# Altium PCB FEV-60_Motor_Driver.PcbDoc (part 2 of 2)
Units mil, origin at the board's own origin, x right, y up, seen from the top; angles counter-clockwise.
Board outline 4025 x 5275 mil, 2 copper layers (Top Layer, Bottom Layer); 167 components, 100 nets, 583 pads, 163 vias.
Unrouted connection lines stored in the file: 1.
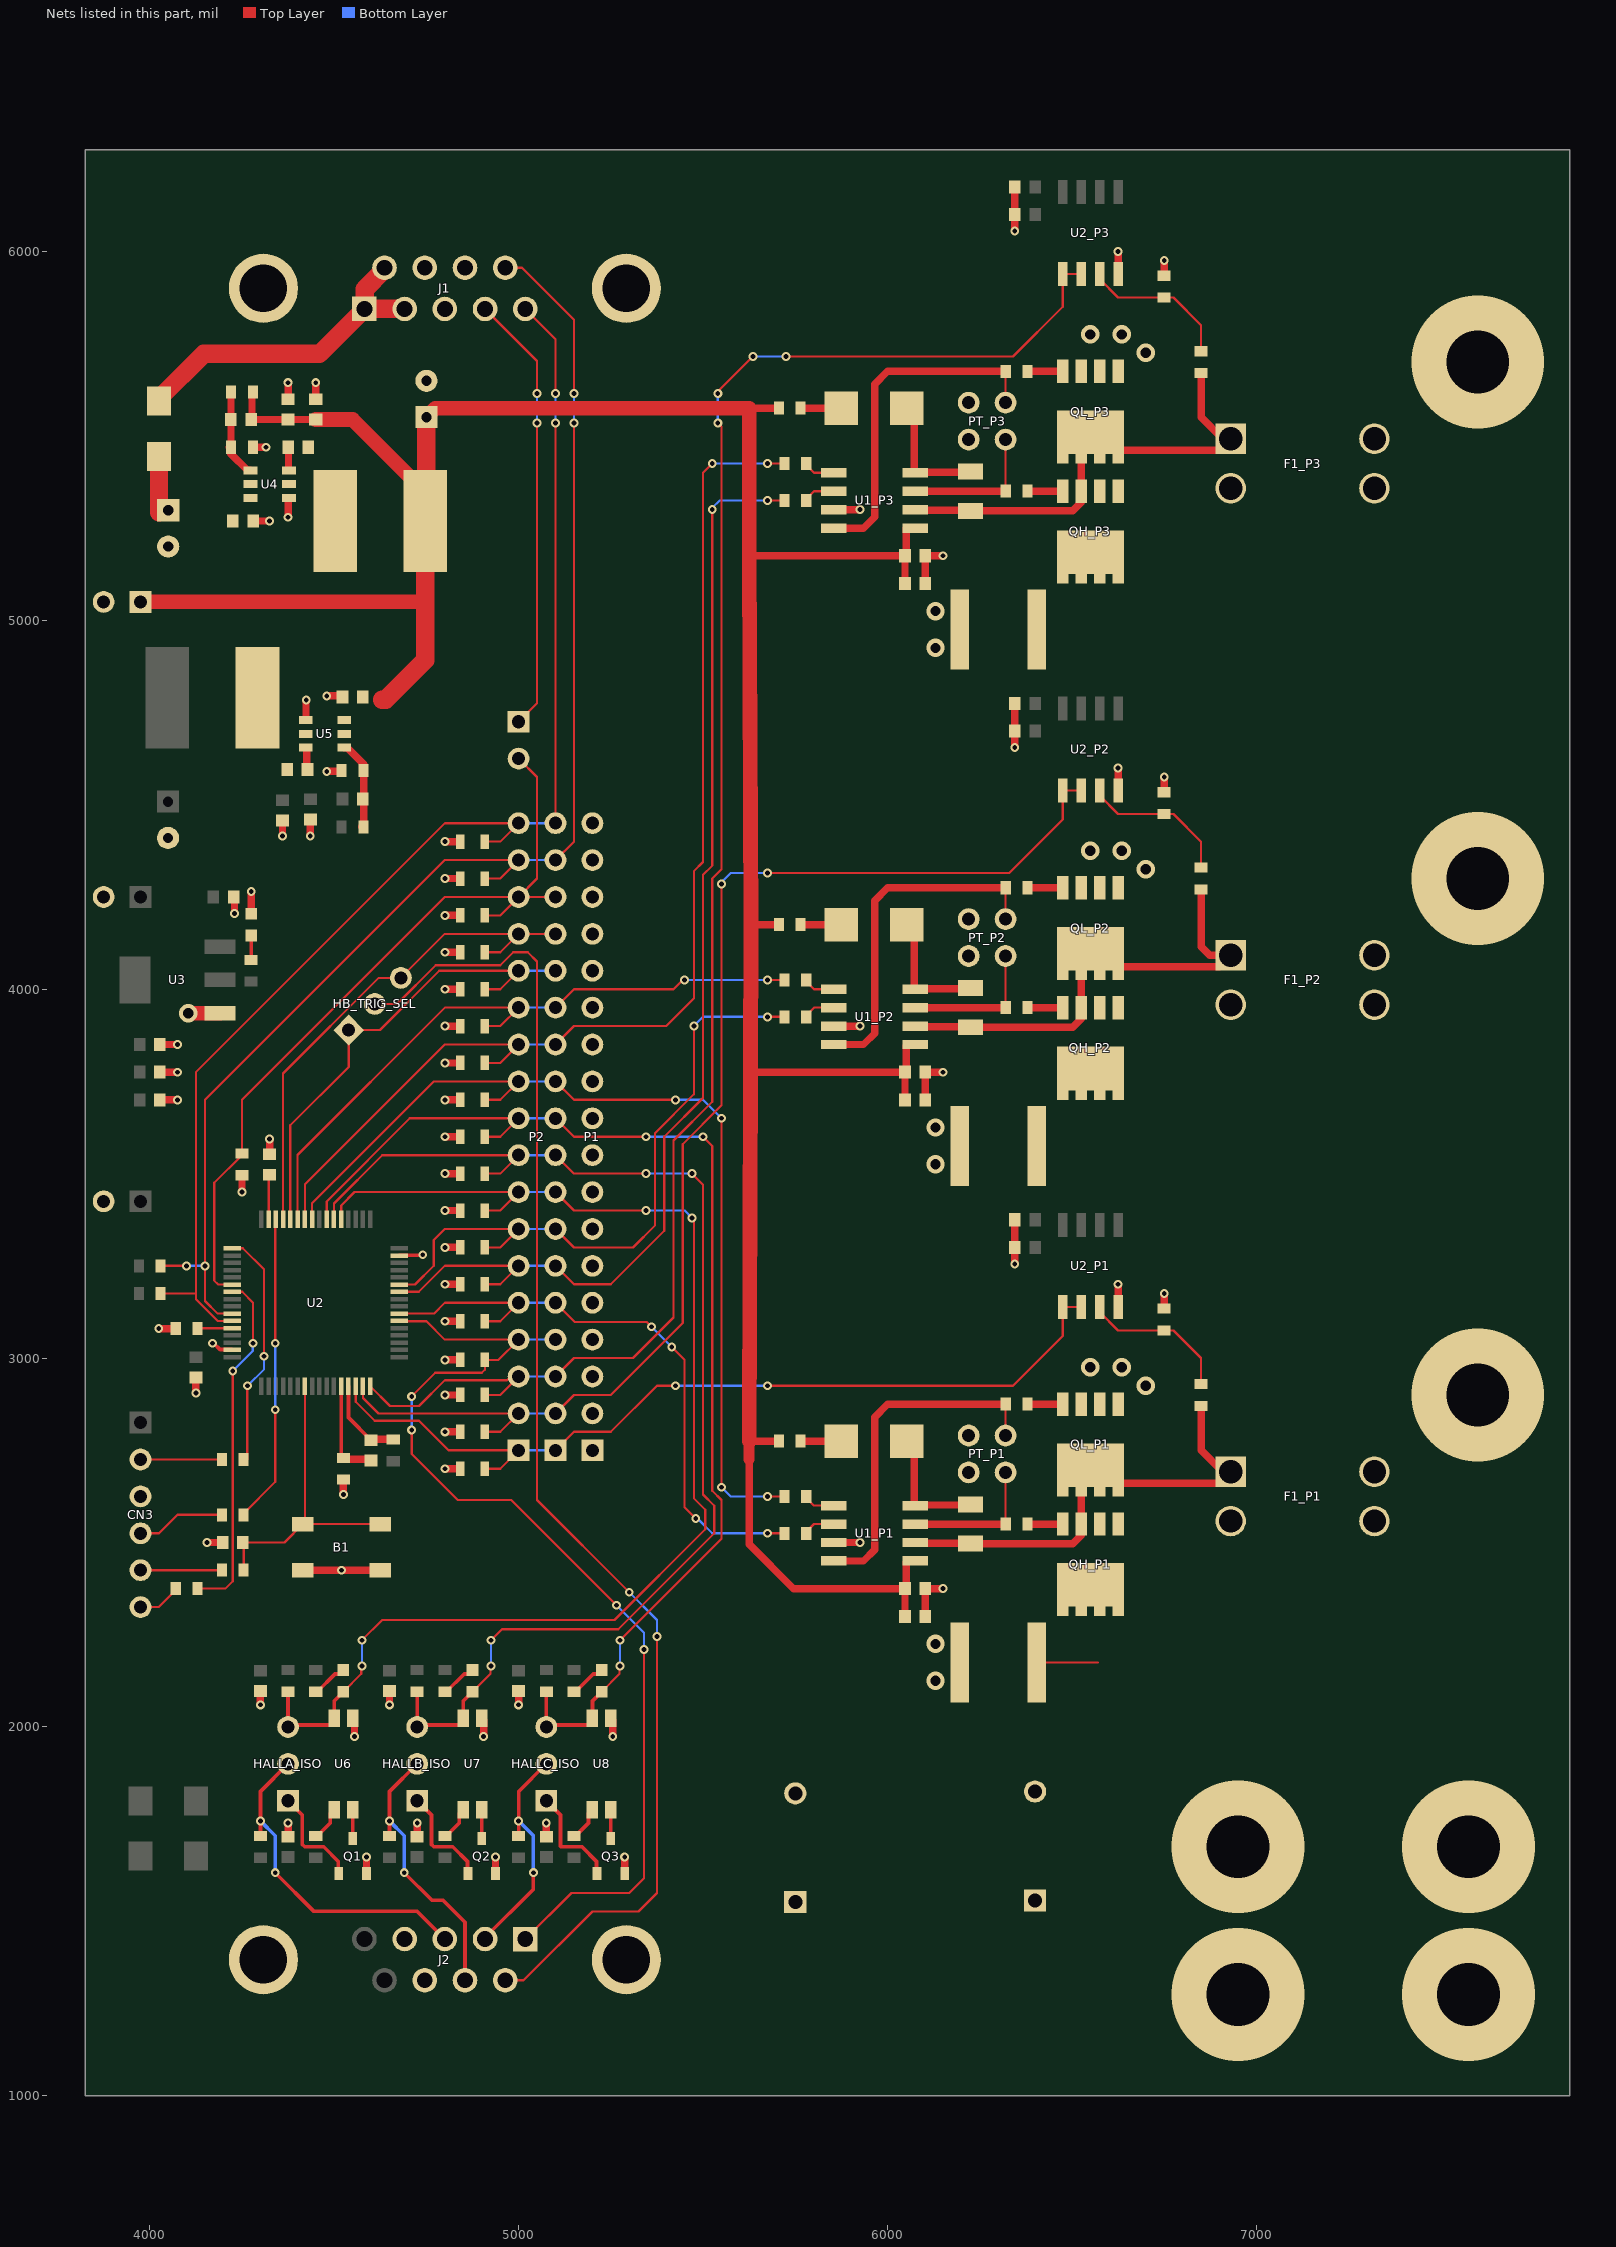
[diagram p2: the nets of this part, all layers, seen from the top]

## Via types
v1: diameter 24, hole 13, Top Layer to Bottom Layer, 125 vias
v2: diameter 50, hole 28, Top Layer to Bottom Layer, 15 vias
v3: diameter 24, hole 13, Top Layer to Bottom Layer, tented both sides, 12 vias
v4: diameter 360, hole 170, Top Layer to Bottom Layer, 7 vias
v5: diameter 200, hole 170, Top Layer to Bottom Layer, 3 vias
v6: diameter 50, hole 28, Top Layer to Bottom Layer, tented both sides, 1 vias

## Nets (pads, with @x,y where several pads share a name; then routed paths per layer and width w, separated by ;. In a path a pad name is that pad's centre, name@x,y a point inside that pad or via, vN(x,y) a via of type N, cw(c..) or ccw(c..) an arc to the next point about the centre after c; other vN are vias at no path point) (continued)
12V: C3.2 C4.1 C10.2 C16.2 C23.2 CU1_1_P1.1 CU1_1_P2.1 CU1_1_P3.1 CU1_2_P1.1 CU1_2_P2.1 CU1_2_P3.1 L2.2 PT_12V.1 R2.1 RB_P1.1 RB_P2.1 RB_P3.1 U1_P1.5 U1_P2.5 U1_P3.5 U5.2 U5.3 | length 8358.7
  Top Layer w20: R2.1@4279.53,5619.21 4277.26,5616.95 4277.26,5546.48 C16.2@4275,5544.21 C10.2@4375,5544.21 C3.2@4450,5544.21 ; 5625,2725 5625,2495 5745,2375 CU1_1_P1.1@6047.44,2375 ; 5625,2775 RB_P1.1@5705.47,2775 ; 5625,3775 5628.57,3775 CU1_1_P2.1@6047.44,3775 ; 5625,5175 6044.33,5175 6047.44,5178.11 CU1_1_P3.1@6050.55,5178.11 ; 5625,5583.29 5616.71,5575 5625,5575 RB_P3.1@5705.47,5575 ; 5630,4175 RB_P2.1@5705.47,4175 ; CU1_2_P1.1@6047.44,2300 CU1_1_P1.1@6047.44,2375 ; CU1_2_P2.1@6047.44,3700 CU1_1_P2.1@6047.44,3775 ; CU1_2_P3.1@6047.44,5100 CU1_1_P3.1@6047.44,5175 CU1_1_P3.1@6050.55,5178.11 ; U1_P1.5@6075,2450 6053.35,2450 6050.55,2447.2 6050.55,2378.11 CU1_1_P1.1@6047.44,2375 ; U1_P2.5@6075,3850 6053.35,3850 6050.55,3847.2 6050.55,3778.11 CU1_1_P2.1@6047.44,3775 ; U1_P3.5@6075,5250 6050.55,5250 CU1_1_P3.1@6050.55,5178.11
  Top Layer w30: 5625,2725 5625,2775
  Top Layer w40: PT_12V.1@3975,5050 4747.05,5050 ; C3.2@4450,5544.21 4550,5544.21 4747.05,5347.17 L2.2@4747.05,5269.21 ; C4.1@4748.52,5549.31 C4.1@4750,5550.79 4774.21,5575 5616.71,5575 ; 5625,2775 5628.57,3775 5630,4175 5625,5175 5625,5575
  Top Layer w50: 4629.65,4785 4640,4785 4747.05,4892.05 4747.05,5050 L2.2@4747.05,5269.21 ; L2.2@4750,5271.38 C4.1@4750,5550
24V: D1.1 J1.1 J1.2 J1.6 | length 908
  Top Layer w50: D1.1@4025,5594.02 4025,5600.91 4146.2,5722.11 4459.9,5722.11 J1.1@4581.89,5844.09 ; J1.6@4636.42,5955.91 4636.42,5951.43 4582.68,5897.69 4582.68,5844.88 J1.1@4581.89,5844.09 ; J1.2@4690.94,5844.09 J1.1@4581.89,5844.09
120V: C5.1 C6.1 CQ2_P1.1 CQ2_P2.1 CQ2_P3.1 QH_P1.1 QH_P2.1 QH_P3.1 | length 165.9
  Top Layer w6: CQ2_P1.1@6404.09,2175 6570,2175
  other v4: 6950,1275 6950,1675
A3V3: C11.2 L1.2 U2.13 | length 232.3
  Top Layer w10: U2.13@4538.58,2923.62 4538.58,2838.98 C11.2@4600,2777.56
  Top Layer w20: C11.2@4600,2777.56 4601.97,2779.53 L1.2@4660,2779.53
AGND: C11.1 R10.2 U2.12 | length 274.6
  Top Layer w10: U2.12@4518.9,2923.62 4518.9,2735.63 R10.2@4525,2729.53
  Top Layer w20: R10.2@4525,2729.53 4528.54,2725.98 4596.46,2725.98 C11.1@4600,2722.44
BOOT0: R3.2 U2.60 | length 94.6
  Top Layer w6: R3.2@4129.53,3080 4130.63,3081.1 U2.60@4223.62,3081.1
EX_TRIG: D13.1 HB_TRIG_SEL.3 P2.29 P2.30 U2.45 | length 1402.7
  Top Layer w6: U2.45@4361.42,3376.38 4361.42,3771.42 4620.71,4030.71 HB_TRIG_SEL.3@4680.71,4030.71 4800,4150 P2.30@5000,4150 ; D13.1@4908.46,4100 4950,4100 P2.30@5000,4150 ; P2.29@5100,4150 P2.30@5000,4150
FB1: C16.1 R2.2 R4.1 U4.1 | length 241.3
  Top Layer w20: R4.1@4215.94,5469.21 4219.72,5465.43 4219.72,5451.85 4264.96,5406.61 U4.1@4272.83,5406.61 ; R4.1@4220.47,5469.21 4220.18,5469.51 4220.18,5543.92 C16.1@4219.88,5544.21 4220.18,5544.51 4220.18,5618.92 R2.2@4220.47,5619.21
FB2: C21.1 R1.2 R5.1 U5.1 | length 235.9
  Top Layer w20: U5.1@4527.17,4654.92 4535.04,4654.92 4580.28,4609.69 R5.1@4580.28,4596.1 ; R1.2@4574.61,4440 R1.2@4574.9,4440.3 ; R5.1@4579.53,4592.32 4579.82,4592.03 4579.82,4517.62 4580.12,4517.32 4579.82,4517.03 R1.2@4579.82,4442.62
GND: 3V3.2 B1.1 B1.4 C1.2 C3.1 C4.2 C5.2 C6.2 C7.1 C8.1 C9.1 C10.1 C12.1 C13.1 C14.1 C15.1 C17.1 C19.1 C20.1 C22.2 C23.1 C24.1 C25.1 C26.1 C27.1 C28.1 C29.1 CN3.3 CQ2_P1.2 CQ2_P2.2 CQ2_P3.2 CU1_1_P1.2 CU1_1_P2.2 CU1_1_P3.2 CU1_2_P1.2 CU1_2_P2.2 CU1_2_P3.2 CU2_1_P1.2 CU2_1_P2.2 CU2_1_P3.2 CU2_2_P1.2 CU2_2_P2.2 CU2_2_P3.2 D2.2 D3.2 D4.2 D5.2 D6.2 D7.2 D8.2 D9.2 D10.2 D11.2 D12.2 D13.2 D14.2 D15.2 D16.2 D17.2 D18.2 D19.2 J1.3 J1.7 J1.8 J1.10 J1.11 J2.4 J2.8 J2.10 J2.11 P1.1 P1.2 P1.3 P1.4 P1.5 P1.6 P1.7 P1.8 P1.9 P1.10 P1.11 P1.12 P1.13 P1.14 P1.15 P1.16 P1.17 P1.18 PT_3V3.2 PT_5V3.2 PT_12V.2 PT_P1.1 PT_P1.3 PT_P2.1 PT_P2.3 PT_P3.1 PT_P3.3 Q1.2 Q2.2 Q3.2 QL_P1.3 QL_P2.3 QL_P3.3 R3.1 R4.2 R5.2 R6.2 R10.1 RV2_P1.1 RV2_P2.1 RV2_P3.1 U1_P1.3 U1_P2.3 U1_P3.3 U2.31 U2.63 U2_P1.4 U2_P2.4 U2_P3.4 U3.1 U4.4 U5.4 U6.3 U7.3 U8.3 | length 3891.4
  Top Layer w10: v1(4170,3040) 4173.79,3040 4190.74,3023.05 4222.62,3023.05 U2.63@4223.62,3022.05 ; U2.31@4676.38,3277.95 4677.38,3278.95 4738.95,3278.95 v1(4740,3280)
  Top Layer w20: v1(4024.53,3080) R3.1@4070.47,3080 ; C13.1@4027.56,3700 4029.23,3698.32 4030.91,3700 v1(4075,3700) ; C14.1@4027.56,3775 v1(4075,3775) ; C15.1@4027.56,3850 v1(4075,3850) ; v1(4125,2905) C8.1@4125,2947.44 ; v1(4155,2500) C7.1@4197.44,2500 ; C12.1@4227.56,4250 4228.68,4251.12 4229.7,4250.1 v1(4229.7,4205.3) ; v1(4250,3450) R6.2@4250,3495.24 ; R6.2@4250,3495.47 R6.2@4250.24,3495.24 ; 3V3.2@4275,4204.53 4274.53,4205 4275,4205.47 v1(4275,4265) ; R4.2@4279.53,5469.21 v1(4315,5469.21) ; C17.1@4280.12,5269.21 v1(4325,5269.21) ; v1(4300,2060) C25.1@4300,2097.44 ; C9.1@4325,3548.86 C9.1@4325,3552.56 v1(4325,3594.09) ; v1(4360,4415) C19.1@4360,4457.44 ; C24.1@4375,1702.56 v1(4375,1740) ; v1(4375,5279.21) 4375.77,5279.98 4375.77,5330.98 4376.59,5331.81 U4.4@4377.17,5331.81 ; C10.1@4375,5599.33 v1(4375,5644.21) ; B1.4@4415,2425 v1(4520,2425) B1.1@4625,2425 ; U5.4@4422.83,4729.72 4423.53,4730.42 4423.53,4783.53 v1(4424.23,4784.23) ; v1(4435,4415) C20.1@4435,4457.44 ; C3.1@4450,5599.33 v1(4450,5644.21) ; v1(4480,4590) 4480.77,4590.77 4518.52,4590.77 R5.2@4520.08,4592.32 ; v1(4480,4795) 4520.93,4795 4522.44,4793.49 C23.1@4522.44,4792.32 ; v1(4525,2630) R10.1@4525,2670.47 ; U6.3@4550,2024.02 4555,2019.02 v3(4555,1974.37) ; Q1.2@4587.4,1602.76 v1(4587.4,1647.4) ; v1(4650,2060) C27.1@4650,2097.44 ; C26.1@4725,1702.56 v1(4725,1740) ; v1(4800,2700) D2.2@4841.54,2700 ; v1(4800,2800) D4.2@4841.54,2800 ; v1(4800,2900) D6.2@4841.54,2900 ; v1(4800,2995) D8.2@4841.54,2995 ; v1(4800,3100) D10.2@4841.54,3100 ; v1(4800,3200) D12.2@4841.54,3200 ; v1(4800,3300) D14.2@4841.54,3300 ; v1(4800,3400) D16.2@4841.54,3400 ; v1(4800,3500) D18.2@4841.54,3500 ; v1(4800,3600) D3.2@4841.54,3600 ; v1(4800,3700) D5.2@4841.54,3700 ; v1(4800,3800) D7.2@4841.54,3800 ; v1(4800,3900) D9.2@4841.54,3900 ; v1(4800,4000) D11.2@4841.54,4000 ; v1(4800,4100) D13.2@4841.54,4100 ; v1(4800,4200) D15.2@4841.54,4200 ; v1(4800,4300) D17.2@4841.54,4300 ; v1(4800,4400) D19.2@4841.54,4400 ; U7.3@4900,2024.02 4905,2019.02 v3(4905,1974.37) ; Q2.2@4937.4,1602.76 v1(4937.4,1647.4) ; v1(5000,2060) C29.1@5000,2097.44 ; C28.1@5075,1702.56 v1(5075,1740) ; U8.3@5250,2024.02 5255,2019.02 v3(5255,1974.37) ; Q3.2@5287.4,1602.76 v1(5287.4,1647.4) ; U1_P1.3@5854.53,2500 v3(5925,2500) ; U1_P2.3@5854.53,3900 v3(5925,3900) ; U1_P3.3@5854.53,5300 v3(5925,5300) ; CU1_2_P1.2@6102.56,2300 CU1_1_P1.2@6102.56,2375 v1(6150,2375) ; CU1_2_P2.2@6102.56,3700 CU1_1_P2.2@6102.56,3775 v1(6150,3775) ; CU1_2_P3.2@6102.56,5100 CU1_1_P3.2@6102.56,5175 v1(6150,5175) ; v1(6344.94,3255.06) CU2_1_P1.2@6344.88,3300 CU2_2_P1.2@6344.88,3375 ; v1(6344.94,4655.06) CU2_1_P2.2@6344.88,4700 CU2_2_P2.2@6344.88,4775 ; CU2_2_P3.2@6344.88,6175 CU2_1_P3.2@6344.88,6100 6344.94,6099.94 6344.94,6055.06 v1(6345,6055) ; U2_P1.4@6625,3138.78 v3(6625,3200) ; U2_P2.4@6625,4538.78 v3(6625,4600) ; U2_P3.4@6625,5938.78 v3(6625,6000) ; RV2_P1.1@6750,3134.06 v1(6750,3175) ; RV2_P2.1@6750,4534.06 v1(6750,4575) ; RV2_P3.1@6750,5934.06 v1(6750,5975)
  Top Layer w40: v6(4104.45,3935) U3.1@4190.16,3935
  other v2: 6130,2125 6130,2225 6700,2925 6550,2975 6635,2975 6130,3525 6130,3625 6700,4325 6550,4375 6635,4375 6130,4925 6130,5025 6700,5725 6550,5775 6635,5775
  other v4: 7575,1275 7575,1675
HALL1: D16.1 HALLA.2 HALLA_ISO.3 P2.15 P2.16 R19.1 U2.37 U6.4 | length 3534.4
  Top Layer w6: U2.37@4518.9,3376.38 4518.9,3413.9 4555,3450 P2.16@5000,3450 4950,3400 D16.1@4908.46,3400 ; HALLA.2@4525,2095.47 4573.53,2144 v1@4573.53,2163.53 ; v1(4575,2235) 4630,2290 5260,2290 5506,2536 5506,2589 5475,2620 v1@5475,3375 ; P2.15@5100,3450 5150,3400 v1(5345,3400)
  Top Layer w10: R19.1@4375,2095.47 HALLA_ISO.3@4375,2000 4380.39,2005.39 4489.25,2005.39 4500,2016.14 U6.4@4500,2024.02 4500,2070.47 HALLA.2@4525,2095.47
  Bottom Layer w6: v1(4575,2165) v1(4575,2235) ; P2.16@5000,3450 P2.15@5100,3450 ; v1(5345,3400) 5450,3400 v1(5470,3380) v1@5475,3375
HALL2: D18.1 HALLB.2 HALLB_ISO.3 P2.17 P2.18 R20.1 U2.38 U7.4 | length 3405.7
  Top Layer w6: U2.38@4499.21,3376.38 4499.21,3419.21 4630,3550 P2.18@5000,3550 4950,3500 D18.1@4908.46,3500 ; HALLB.2@4875,2095.47 4923.53,2144 v1@4923.53,2163.53 ; v1(4925,2235) 4955,2265 5270,2265 5530,2525 5530,2600 5500,2630 5500,3470 v1(5470,3500) ; P2.17@5100,3550 5150,3500 v1(5345,3500)
  Top Layer w10: R20.1@4725,2095.47 HALLB_ISO.3@4725,2000 4730.39,2005.39 4839.25,2005.39 4850,2016.14 U7.4@4850,2024.02 4850,2070.47 HALLB.2@4875,2095.47
  Bottom Layer w6: v1(4925,2165) v1(4925,2235) ; P2.18@5000,3550 P2.17@5100,3550 ; v1(5345,3500) v1(5470,3500) v1@5475,3500
HALL3: D3.1 HALLC.2 HALLC_ISO.3 P2.19 P2.20 R21.1 U2.39 U8.4 | length 3269.6
  Top Layer w6: U2.39@4479.53,3376.38 4479.53,3424.53 4705,3650 P2.20@5000,3650 4950,3600 D3.1@4908.46,3600 ; P2.19@5100,3650 5150,3600 v1(5345,3600) ; HALLC.2@5225,2095.47 5273.53,2144 v1@5273.53,2163.53 ; v1(5275,2235) 5550,2510 5550,2615 5525,2640 5525,3575 v1(5500,3600)
  Top Layer w10: R21.1@5075,2095.47 HALLC_ISO.3@5075,2000 5080.39,2005.39 5189.25,2005.39 5200,2016.14 U8.4@5200,2024.02 5200,2070.47 HALLC.2@5225,2095.47
  Bottom Layer w6: P2.20@5000,3650 P2.19@5100,3650 ; v1(5275,2165) v1(5275,2235) ; v1(5345,3600) v1(5500,3600)
HALLA: HALLA_ISO.2 J2.3 R22.1 | length 917.7
  Top Layer w10: R22.1@4300,1704.53 4300,1825 HALLA_ISO.2@4375,1900 ; v1(4340,1605) 4445,1500 4725,1500 J2.3@4800,1425
  Bottom Layer w10: v1(4300,1745) 4340,1705 v1(4340,1605)
HALLB: HALLB_ISO.2 J2.7 R23.1 | length 760.6
  Top Layer w10: R23.1@4650,1704.53 v1(4650,1745) 4650,1825 HALLB_ISO.2@4725,1900 ; v1(4690,1605) 4765,1530 4795,1530 4854.53,1470.47 J2.7@4854.53,1313.19
  Bottom Layer w10: v1(4650,1745) 4690,1705 v1(4690,1605)
HALLC: HALLC_ISO.2 J2.2 R24.1 | length 616.2
  Top Layer w10: J2.2@4907.03,1427.03 5040,1560 v1(5040,1605) ; R24.1@5000,1704.53 5000,1825 HALLC_ISO.2@5075,1900
  Bottom Layer w10: v1(5000,1745) 5040,1705 v1(5040,1605)
HB_TRIG: HB_TRIG_SEL.2 J2.6 | length 3677.5
  Top Layer w6: HB_TRIG_SEL.2@4610,3960 4670,3960 4775,4065 4950,4065 4985,4100 5025,4100 5050,4075 5050,2615 v1(5300,2365) ; J2.6@4963.58,1313.19 5013.19,1313.19 5200,1500 5325,1500 5375,1550 v1(5375,2245)
  Bottom Layer w6: v1(5300,2365) 5375,2290 v1(5375,2245)
HB_TRIG_SEL: 
HIN1: D5.1 P2.21 P2.22 RU1H_P1.2 U2.41 | length 2624.7
  Top Layer w6: U2.41@4440.16,3376.38 4440.16,3420.16 4770,3750 P2.22@5000,3750 4950,3700 D5.1@4908.46,3700 ; P2.21@5100,3750 5150,3700 v1(5425,3700) ; v1(5550,2650) v1(5550,3650) ; v1(5675,2625) RU1H_P1.2@5720.47,2625
  Bottom Layer w6: P2.22@5000,3750 P2.21@5100,3750 ; v1(5425,3700) 5500,3700 v1(5550,3650) ; v1(5550,2650) 5575,2625 v1(5675,2625)
HIN2: D9.1 P2.25 P2.26 RU1H_P2.2 U2.43 | length 1802.8
  Top Layer w6: U2.43@4400.79,3376.38 4400.79,3550.79 4800,3950 P2.26@5000,3950 4950,3900 D9.1@4908.46,3900 ; P2.25@5100,3950 5150,4000 5420,4000 5445,4025 v1(5450,4025) ; v1(5675,4025) RU1H_P2.2@5720.47,4025
  Bottom Layer w6: P2.26@5000,3950 P2.25@5100,3950 ; v1(5450,4025) v1(5675,4025)
HIN3: D7.1 P2.23 P2.24 RU1H_P3.2 U2.42 | length 3136
  Top Layer w6: U2.42@4420.47,3376.38 4420.47,3470.47 4800,3850 P2.24@5000,3850 4950,3800 D7.1@4908.46,3800 ; P2.23@5100,3850 5150,3900 5400,3900 5475,3975 5475,4320 5500,4345 5500,5400 v1(5525,5425) ; v1(5675,5425) RU1H_P3.2@5720.47,5425
  Bottom Layer w6: P2.24@5000,3850 P2.23@5100,3850 ; v1(5525,5425) v1(5675,5425)
HO_P1: PT_P1.4 RQH_P1.1 U1_P1.7 | length 385
  Top Layer w6: RQH_P1.1@6320,2550.47 PT_P1.4@6320,2690
  Top Layer w20: U1_P1.7@6075,2550 RQH_P1.1@6320.47,2550
HO_P2: PT_P2.4 RQH_P2.1 U1_P2.7 | length 385
  Top Layer w6: RQH_P2.1@6320,3950.47 PT_P2.4@6320,4090
  Top Layer w20: U1_P2.7@6075,3950 RQH_P2.1@6320.47,3950
HO_P3: PT_P3.4 RQH_P3.1 U1_P3.7 | length 385.7
  Top Layer w6: PT_P3.4@6320,5490 6320,5350.47 RQH_P3.1@6320.47,5350
  Top Layer w20: U1_P3.7@6075,5350 RQH_P3.1@6320.47,5350
ISOA: HALLA_ISO.1 Q1.1 | length 284.5
  Top Layer w10: HALLA_ISO.1@4375,1800 4413.67,1761.33 4413.67,1681.33 4420,1675 4471.65,1675 4511.18,1635.47 4511.18,1604.17 Q1.1@4512.6,1602.76
ISOB: HALLB_ISO.1 Q2.1 | length 284.5
  Top Layer w10: HALLB_ISO.1@4725,1800 4763.67,1761.33 4763.67,1681.33 4770,1675 4821.65,1675 4861.18,1635.47 4861.18,1604.17 Q2.1@4862.6,1602.76
ISOC: HALLC_ISO.1 Q3.1 | length 287.4
  Top Layer w10: HALLC_ISO.1@5075,1800 5113.67,1761.33 5113.67,1676.33 5115,1675 5171.65,1675 5211.18,1635.47 5211.18,1604.17 Q3.1@5212.6,1602.76
LIN1: D10.1 P2.9 P2.10 RU1L_P1.2 U2.23 | length 1661.8
  Top Layer w6: U2.23@4676.38,3120.47 4770.47,3120.47 4800,3150 P2.10@5000,3150 4950,3100 D10.1@4908.46,3100 ; P2.9@5100,3150 5152.02,3097.98 5347.02,3097.98 v1(5360,3085) ; v1(5415,3030) 5450,2995 5450,2595 v1(5480,2565) ; v1(5675,2525) RU1L_P1.2@5720.47,2525
  Bottom Layer w6: P2.10@5000,3150 P2.9@5100,3150 ; v1(5360,3085) v1(5415,3030) ; v1(5480,2565) 5485,2565 5525,2525 v1(5675,2525)
LIN2: D14.1 P2.13 P2.14 RU1L_P2.2 U2.27 | length 1794.2
  Top Layer w6: U2.27@4676.38,3199.21 4719.21,3199.21 4770,3250 4770,3320 4800,3350 P2.14@5000,3350 4950,3300 D14.1@4908.46,3300 ; P2.13@5100,3350 5150,3300 5310,3300 5370,3360 5370,3610 5475,3715 v1(5475,3900) ; v1(5675,3925) RU1L_P2.2@5720.47,3925
  Bottom Layer w6: P2.14@5000,3350 P2.13@5100,3350 ; v1(5475,3900) 5500,3925 v1(5675,3925)
LIN3: D12.1 P2.11 P2.12 RU1L_P3.2 U2.26 | length 3158.4
  Top Layer w6: U2.26@4676.38,3179.53 4729.53,3179.53 4800,3250 P2.12@5000,3250 4950,3200 D12.1@4908.46,3200 ; P2.11@5100,3250 5150,3200 5250,3200 5395,3345 5395,3600 5500,3705 5500,4310 5525,4335 v1(5525,5300) ; v1(5675,5325) RU1L_P3.2@5720.47,5325
  Bottom Layer w6: P2.12@5000,3250 P2.11@5100,3250 ; v1(5525,5300) 5525,5305 5545,5325 v1(5675,5325)
LO_P1: PT_P1.2 RQL_P1.1 U1_P1.4 | length 937.4
  Top Layer w6: PT_P1.2@6320,2790 RQL_P1.1@6320,2874.53
  Top Layer w20: U1_P1.4@5854.53,2450 5935,2450 5965,2480 5965,2840 6000,2875 6120,2875 RQL_P1.1@6320.47,2875
LO_P2: PT_P2.2 RQL_P2.1 U1_P2.4 | length 937.4
  Top Layer w6: PT_P2.2@6320,4190 RQL_P2.1@6320,4274.53
  Top Layer w20: U1_P2.4@5854.53,3850 5935,3850 5965,3880 5965,4240 6000,4275 RQL_P2.1@6320.47,4275
LO_P3: PT_P3.2 RQL_P3.1 U1_P3.4 | length 938.1
  Top Layer w6: PT_P3.2@6320,5590 6320,5674.53 RQL_P3.1@6320.47,5675
  Top Layer w20: U1_P3.4@5854.53,5250 5935,5250 5965,5280 5965,5640 6000,5675 RQL_P3.1@6320.47,5675
M_HB: D11.1 HB_TRIG_SEL.1 P2.27 P2.28 U2.44 | length 1318
  Top Layer w6: U2.44@4381.1,3376.38 4381.1,3631.1 4539.29,3789.29 HB_TRIG_SEL.1@4539.29,3889.29 4624.29,3889.29 4785,4050 P2.28@5000,4050 4950,4000 D11.1@4908.46,4000
  Bottom Layer w6: P2.28@5000,4050 P2.27@5100,4050
Net3V3_1: 3V3.1 R7.1 | length 65.9
  Top Layer w10: R7.1@4275,4079.53 3V3.1@4275,4145.48
NetC1_1: C1.1 C17.2 D1.2 U4.2 U4.3 | length 159.6
  Top Layer w20: U4.3@4264.96,5331.81 U4.3@4272.83,5331.81
  Top Layer w50: C1.1@4025,5292.64 D1.2@4025,5444.41
NetC2_1: C2.1 L2.1 U4.5
NetC2_2: C2.2 U4.6 | length 63.6
  Top Layer w20: C2.2@4375,5469.21 4376.08,5468.13 4376.08,5407.44 4376.91,5406.61 U4.6@4377.17,5406.61
NetC18_1: C18.1 L3.1 U5.5
NetC18_2: C18.2 U5.6 | length 62.8
  Top Layer w20: U5.6@4422.83,4654.92 4424.37,4654.92 4425.2,4654.09 4425.2,4597.36 C18.2@4427.56,4595
NetCB_P1_1: 
NetCB_P1_2: CB_P1.2 DB_P1.2 U1_P1.8 | length 335.8
  Top Layer w20: DB_P1.2@6052.16,2775 6072.2,2754.96 6072.2,2602.8 U1_P1.8@6075,2600 6076.57,2601.57 6223.43,2601.57 CB_P1.2@6225,2603.15
NetCB_P2_1: 
NetCB_P2_2: CB_P2.2 DB_P2.2 U1_P2.8 | length 335.8
  Top Layer w20: DB_P2.2@6052.16,4175 6072.2,4154.96 6072.2,4002.8 U1_P2.8@6075,4000 6076.57,4001.57 6223.43,4001.57 CB_P2.2@6225,4003.15
NetCB_P3_1: 
NetCB_P3_2: CB_P3.2 DB_P3.2 U1_P3.8 | length 335.8
  Top Layer w20: DB_P3.2@6052.16,5575 6072.2,5554.96 6072.2,5402.8 U1_P3.8@6075,5400 6076.57,5401.57 6223.43,5401.57 CB_P3.2@6225,5403.15
NetCN3_2: CN3.2 R9.1 | length 220.5
  Top Layer w6: CN3.2@3975,2725 4024.41,2725 R9.1@4195.47,2725
NetCN3_4: CN3.4 R11.1 | length 258.4
  Top Layer w6: CN3.4@3975,2525 4025,2525 4075,2575 R11.1@4195.47,2575 ; R11.1@4184.69,2560.28 4195.47,2571.06 R11.1@4195.47,2573.03
NetCN3_5: CN3.5 R12.1 | length 225
  Top Layer w6: CN3.5@3975,2425 R12.1@4200,2425
NetCN3_6: CN3.6 R13.1 | length 118.5
  Top Layer w6: CN3.6@3975,2325 4024.41,2325 4070.47,2371.06 R13.1@4070.47,2375
NetDB_P1_1: DB_P1.1 RB_P1.2 | length 110.5
  Top Layer w20: RB_P1.2@5764.53,2775 DB_P1.1@5875,2775
NetDB_P2_1: DB_P2.1 RB_P2.2 | length 110.5
  Top Layer w20: RB_P2.2@5764.53,4175 DB_P2.1@5875,4175
NetDB_P3_1: DB_P3.1 RB_P3.2 | length 110.5
  Top Layer w20: RB_P3.2@5764.53,5575 DB_P3.1@5875,5575
NetF1_P1_3: F1_P1.3 F1_P1.4
  other v4: 7600,2900
NetF1_P2_3: F1_P2.3 F1_P2.4
  other v4: 7600,4300
NetF1_P3_3: F1_P3.3 F1_P3.4
  other v4: 7600,5700
NetHALLA_1: HALLA.1 R8.1 | length 99.5
  Top Layer w10: R8.1@4450,2095.47 4453.94,2095.47 4502.24,2143.78 4514.26,2143.78 HALLA.1@4525,2154.52
NetHALLB_1: HALLB.1 R14.1 | length 99.5
  Top Layer w10: R14.1@4800,2095.47 4803.94,2095.47 4852.24,2143.78 4864.26,2143.78 HALLB.1@4875,2154.52
NetHALLC_1: HALLC.1 R15.1 | length 99.5
  Top Layer w10: R15.1@5150,2095.47 5153.94,2095.47 5202.24,2143.78 5214.26,2143.78 HALLC.1@5225,2154.52
NetQ1_3: Q1.3 U6.2 | length 78.7
  Top Layer w10: Q1.3@4550,1697.24 U6.2@4550,1775.98
NetQ2_3: Q2.3 U7.2 | length 78.7
  Top Layer w10: Q2.3@4900,1697.24 U7.2@4900,1775.98
NetQ3_3: Q3.3 U8.2 | length 78.7
  Top Layer w10: Q3.3@5250,1697.24 U8.2@5250,1775.98
NetQH_P1_2: QH_P1.2 RQH_P1.2 | length 95.5
  Top Layer w20: RQH_P1.2@6379.53,2550 QH_P1.2@6475,2550
NetQH_P1_3: CB_P1.1 F1_P1.1 F1_P1.2 QH_P1.3 QL_P1.1 RV1_P1.2 U1_P1.6 | length 1166.9
  Top Layer w20: U1_P1.6@6075,2500 6076.57,2498.43 6223.43,2498.43 CB_P1.1@6225,2496.85 6501.85,2496.85 6525,2520 QH_P1.3@6525,2550 QL_P1.1@6525,2656.65 ; QL_P1.1@6625,2656.65 6628.94,2660.59 6898.78,2660.59 F1_P1.1@6930.12,2691.93 ; RV1_P1.2@6850,2870.47 6850,2750 6908.07,2691.93 F1_P1.1@6930.12,2691.93 ; F1_P1.1@6955.12,2691.93 F1_P1.1@6930.12,2691.93
NetQH_P2_2: QH_P2.2 RQH_P2.2 | length 95.5
  Top Layer w20: RQH_P2.2@6379.53,3950 QH_P2.2@6475,3950
NetQH_P2_3: CB_P2.1 F1_P2.1 F1_P2.2 QH_P2.3 QL_P2.1 RV1_P2.2 U1_P2.6 | length 1187.4
  Top Layer w20: U1_P2.6@6075,3900 6076.57,3898.43 6223.43,3898.43 CB_P2.1@6225,3896.85 6501.85,3896.85 6525,3920 QH_P2.3@6525,3950 QL_P2.1@6525,4056.65 ; QL_P2.1@6625,4056.65 6628.94,4060.59 6898.78,4060.59 F1_P2.1@6930.12,4091.93 ; RV1_P2.2@6850,4270.47 6850,4115 6873.07,4091.93 F1_P2.1@6930.12,4091.93 ; F1_P2.1@6955.12,4091.93 F1_P2.1@6930.12,4091.93
NetQH_P3_2: QH_P3.2 RQH_P3.2 | length 95.5
  Top Layer w20: RQH_P3.2@6379.53,5350 QH_P3.2@6475,5350
NetQH_P3_3: CB_P3.1 F1_P3.1 F1_P3.2 QH_P3.3 QL_P3.1 RV1_P3.2 U1_P3.6 | length 1166.9
  Top Layer w20: U1_P3.6@6075,5300 6076.57,5298.43 6223.43,5298.43 CB_P3.1@6225,5296.85 6501.85,5296.85 6525,5320 QH_P3.3@6525,5350 QL_P3.1@6525,5456.65 ; QL_P3.1@6625,5456.65 6628.94,5460.59 6898.78,5460.59 F1_P3.1@6930.12,5491.93 ; RV1_P3.2@6850,5670.47 6850,5550 6908.07,5491.93 F1_P3.1@6930.12,5491.93 ; F1_P3.1@6955.12,5491.93 F1_P3.1@6930.12,5491.93
NetQL_P1_2: QL_P1.2 RQL_P1.2 | length 95.5
  Top Layer w20: RQL_P1.2@6379.53,2875 QL_P1.2@6475,2875
NetQL_P2_2: QL_P2.2 RQL_P2.2 | length 95.5
  Top Layer w20: RQL_P2.2@6379.53,4275 QL_P2.2@6475,4275
NetQL_P3_2: QL_P3.2 RQL_P3.2 | length 95.5
  Top Layer w20: RQL_P3.2@6379.53,5675 QL_P3.2@6475,5675
NetR16_1: R16.1 U6.1 | length 94.5
  Top Layer w10: R16.1@4450,1704.53 4453.94,1704.53 4489.25,1739.84 4489.25,1765.24 U6.1@4500,1775.98
NetR17_1: R17.1 U7.1 | length 94.5
  Top Layer w10: R17.1@4800,1704.53 4803.94,1704.53 4839.25,1739.84 4839.25,1765.24 U7.1@4850,1775.98
NetR18_1: R18.1 U8.1 | length 94.5
  Top Layer w10: R18.1@5150,1704.53 5153.94,1704.53 5189.25,1739.84 5189.25,1765.24 U8.1@5200,1775.98
NetRU1H_P1_1: RU1H_P1.1 U1_P1.1 | length 87.7
  Top Layer w6: RU1H_P1.1@5779.53,2625 5779.53,2621.06 5800.59,2600 U1_P1.1@5854.53,2600
NetRU1H_P2_1: RU1H_P2.1 U1_P2.1 | length 87.7
  Top Layer w6: RU1H_P2.1@5779.53,4025 5779.53,4021.06 5800.59,4000 U1_P2.1@5854.53,4000
NetRU1H_P3_1: RU1H_P3.1 U1_P3.1 | length 87.7
  Top Layer w6: RU1H_P3.1@5779.53,5425 5779.53,5421.06 5800.59,5400 U1_P3.1@5854.53,5400
NetRU1L_P1_1: RU1L_P1.1 U1_P1.2 | length 87.7
  Top Layer w6: RU1L_P1.1@5779.53,2525 5779.53,2528.94 5800.59,2550 U1_P1.2@5854.53,2550
NetRU1L_P2_1: RU1L_P2.1 U1_P2.2 | length 87.7
  Top Layer w6: RU1L_P2.1@5779.53,3925 5779.53,3928.94 5800.59,3950 U1_P2.2@5854.53,3950
NetRU1L_P3_1: RU1L_P3.1 U1_P3.2 | length 87.7
  Top Layer w6: RU1L_P3.1@5779.53,5325 5779.53,5328.94 5800.59,5350 U1_P3.2@5854.53,5350
NetRV1_P1_1: RV1_P1.1 RV2_P1.2 U2_P1.3 | length 415.6
  Top Layer w6: U2_P1.3@6575,3138.78 6575,3125 6625,3075 RV2_P1.2@6750,3075 6775,3075 6850,3000 RV1_P1.1@6850,2929.53 RV1_P1.1@6850,2925
NetRV1_P2_1: RV1_P2.1 RV2_P2.2 U2_P2.3 | length 411
  Top Layer w6: U2_P2.3@6575,4538.78 6575,4525 6625,4475 RV2_P2.2@6750,4475 6775,4475 6850,4400 RV1_P2.1@6850,4329.53
NetRV1_P3_1: RV1_P3.1 RV2_P3.2 U2_P3.3 | length 411
  Top Layer w6: U2_P3.3@6575,5938.78 6575,5925 6625,5875 RV2_P3.2@6750,5875 6775,5875 6850,5800 RV1_P3.1@6850,5729.53
NRST: B1.2 B1.3 C7.2 R12.2 U2.7 | length 846.4
  Top Layer w6: R12.2@4254.53,2425 4254.53,2495.47 4250,2500 4365,2500 B1.3@4415,2550 B1.3@4420,2550 ; U2.7@4420.47,2923.62 4420.47,2550.47 B1.3@4420,2550 ; B1.2@4625,2550 B1.3@4420,2550
ON_SW: D15.1 ON_SW_ISO.2 P2.31 P2.32 R6.1 U2.54 | length 2180.6
  Top Layer w6: U2.54@4223.62,3199.21 4185.79,3199.21 4175,3210 4175,3475 4250,3550 R6.1@4250,3554.53 4250,3700 4800,4250 P2.32@5000,4250 ; D15.1@4908.46,4200 4950,4200 P2.32@5000,4250 ; ON_SW_ISO.2@5000,4625 5050,4575 5050,4300 P2.32@5000,4250 ; P2.31@5100,4250 P2.32@5000,4250
ON_SWD: J1.4 ON_SW_ISO.1 | length 1198.2
  Top Layer w6: J1.4@4909.06,5844.09 5050,5703.15 v1(5050,5615) ; ON_SW_ISO.1@5000,4725 5050,4775 v1(5050,5535)
  Bottom Layer w6: v1(5050,5535) v1(5050,5615)
PB3: R13.2 U2.55 | length 945.1
  Top Layer w6: R13.2@4129.53,2375 4205,2375 4225,2395 v1@4225,2960 ; U2.55@4223.62,3179.53 4250.47,3179.53 4280,3150 v3(4280,3040)
  Bottom Layer w6: v1(4225,2965) 4279,3019 4279,3039 v3(4280,3040)
PF6: C9.2 U2.47 | length 121.3
  Top Layer w6: U2.47@4322.05,3376.38 4322.56,3376.89 C9.2@4322.56,3497.44
TCK: R9.2 U2.49 | length 643.9
  Top Layer w6: U2.49@4223.62,3297.64 4252.36,3297.64 4310,3240 v3(4310,3005) ; R9.2@4264.53,2725 v1@4264.53,2925
  Bottom Layer w6: v1(4265,2925) 4310,2970 v3(4310,3005)
THROTTLE: D8.1 J2.1 P2.7 P2.8 U2.22 | length 2855.1
  Top Layer w6: U2.22@4677.17,3100 4750,3100 4800,3050 P2.8@5000,3050 4945,2995 D8.1@4908.46,2995 4908.46,2968.46 4900,2960 4773.78,2960 v1(4710,2896.22) ; v1(4710,2805) 4710,2740 4835,2615 4980,2615 v1(5265,2330) ; J2.1@5018.11,1425 5143.11,1550 5300,1550 5340,1590 v1(5340,2210)
  Bottom Layer w6: v1(4710,2805) v1(4710,2896.22) ; P2.8@5000,3050 P2.7@5100,3050 ; v1(5265,2330) 5340,2255 v1(5340,2210)
TMS: R11.2 U2.46 | length 837.5
  Top Layer w6: R11.2@4254.53,2575 4254.53,2578.94 4340,2664.41 v1(4340,2860) ; v3(4340,3040) 4340,3374.65 U2.46@4341.73,3376.38
  Bottom Layer w6: v1(4340,2860) v3(4340,3040)
USART_RX: D19.1 J1.5 P2.35 P2.36 R26.1 U2.59 | length 3628.5
  Top Layer w6: R26.1@4029.53,3175 4125,3175 ; U2.59@4223.62,3100.79 4184.21,3100.79 4125,3160 4125,3175 ; D19.1@4908.46,4400 4950,4400 P2.36@5000,4450 4800,4450 4125,3775 4125,3550 4125,3175 ; J1.5@5018.11,5844.09 5100,5762.2 v1(5100,5615) ; P2.35@5100,4450 v1(5100,5535)
  Bottom Layer w6: P2.36@5000,4450 P2.35@5100,4450 ; v1(5100,5535) v1(5100,5615)
USART_TX: D17.1 J1.9 P2.33 P2.34 R25.1 U2.58 | length 3815.4
  Top Layer w6: R25.1@4029.53,3250 v1(4100,3250) ; U2.58@4223.62,3120.47 4184.53,3120.47 4150,3155 v1(4150,3250) 4150,3700 4800,4350 P2.34@5000,4350 4950,4300 D17.1@4908.46,4300 ; J1.9@4963.58,5955.91 5009.09,5955.91 5150,5815 v1(5150,5615) ; P2.33@5100,4350 5150,4400 v1(5150,5535)
  Bottom Layer w6: v1(4100,3250) v1(4150,3250) ; P2.34@5000,4350 P2.33@5100,4350 ; v1(5150,5535) v1(5150,5615)
V_SENSE1: D2.1 P2.1 P2.2 U2.14 U2_P1.1 U2_P1.2 | length 2382.6
  Top Layer w6: U2.14@4558.27,2923.62 4558.27,2881.73 4610,2830 4730,2830 4810,2750 P2.2@5000,2750 4950,2700 D2.1@4908.46,2700 ; P2.1@5100,2750 5150,2800 5250,2800 5375,2925 v1(5425,2925) ; v1(5675,2925) 6340,2925 6475,3060 U2_P1.1@6475,3138.78 U2_P1.2@6525,3138.78
  Bottom Layer w6: P2.2@5000,2750 P2.1@5100,2750 ; v1(5425,2925) v1(5675,2925)
V_SENSE2: D4.1 P2.3 P2.4 U2.15 U2_P2.1 U2_P2.2 | length 3492.5
  Top Layer w6: U2.15@4577.95,2923.62 4577.95,2892.05 4620,2850 P2.4@5000,2850 4950,2800 D4.1@4908.46,2800 ; P2.3@5100,2850 5150,2900 5250,2900 5445,3095 5445,3580 5550,3685 v1(5550,4285) ; v1(5675,4315) 6330,4315 6475,4460 U2_P2.1@6475,4538.78 U2_P2.2@6525,4538.78
  Bottom Layer w6: P2.4@5000,2850 P2.3@5100,2850 ; v1(5550,4285) 5550,4290 5575,4315 v1(5675,4315)
V_SENSE3: D6.1 P2.5 P2.6 U2.16 U2_P3.1 U2_P3.2 | length 4770.6
  Top Layer w6: U2.16@4597.64,2923.62 4651.26,2870 4730,2870 4800,2940 4968.27,2940 P2.6@4976.89,2948.62 ; D6.1@4908.46,2900 4950,2900 4998.27,2948.27 4998.27,2950 P2.6@5000,2950 ; P2.5@5100,2950 5150,3000 5310,3000 5420,3110 5420,3590 5525,3695 5525,4300 5550,4325 5550,5525 v1(5540,5535) ; v1@5540,5620 v1(5635,5715) ; v1(5725,5715) 6340,5715 6475,5850 U2_P3.1@6475,5938.78 U2_P3.2@6525,5938.78
  Bottom Layer w6: P2.6@5000,2950 P2.5@5100,2950 ; v1(5540,5535) v1(5540,5615) v1@5540,5620 ; v1(5635,5715) v1(5725,5715)
pads on no net: U2.2 U2.3 U2.4 U2.5 U2.6 U2.8 U2.9 U2.10 U2.11 U2.17 U2.18 U2.19 U2.20 U2.21 U2.24 U2.25 U2.28 U2.29 U2.30 U2.33 U2.34 U2.35 U2.36 U2.40 U2.48 U2.50 U2.51 U2.52 U2.53 U2.56 U2.57 U2.61 U2.62 U2_P1.5 U2_P1.6 U2_P1.7 U2_P2.5 U2_P2.6 U2_P2.7 U2_P3.5 U2_P3.6 U2_P3.7
copper on no net:
  other v5: 3975,1150 3975,6125 7075,6125

## Polygon pours and split planes (outlines as drawn)
no net on Top Layer "Top Layer-No Net 3" (solid, pour order 28): 7350,1900
no net on Top Layer "Top Layer-No Net 2" (solid, pour order 26): 4187.56,4280
no net on Top Layer "Top Layer-No Net" (solid, pour order 4): 2075,3675
no net on Top Layer "Top Layer-No Net 1" (solid, pour order 2): 2260,3750
GND on Bottom Layer "Bottom Layer-GND" (solid, pour order 22): 3825,1000 7850,1000 7850,6275 3825,6275

## Other copper
Top Layer:
  region net 120V: 6725,1574.99 6725,1674.99 6625,1574.99
  region net NetC18_1: 4437.05,4682.32 4402.05,4682.32 4392.05,4672.32 4392.05,4582.32 4380.39,4570.67 4313.7,4570.67 4232.05,4652.32 4232.05,4932.32 4357.05,4932.32 4357.05,4727.32 4382.05,4702.32 4437.05,4702.32
  region net 12V: 4655,4765 4572.32,4682.32 4512.95,4682.32 4512.95,4712.32 4512.95,4742.32 4547.95,4742.32 4562.95,4757.32 4562.95,4812.32 4655,4812.32
  region net NetC1_1: 4290,5319.21 4255,5319.21 4240,5304.21 4240,5249.21 4000,5249.21 4000,5379.21 4290,5379.21 4290,5349.21
  region net 120V: 7000,4870 6900,4870 7000,4770
  region net 120V: 6725.01,2070 6625.01,2070 6725.01,1970
  region net 120V: 7000.01,3470 6900.01,3470 7000.01,3370
  region net NetC2_1: 4360,5379.21 4395,5379.21 4405,5389.21 4405,5479.21 4416.65,5490.87 4483.35,5490.87 4565,5409.21 4565,5129.21 4440,5129.21 4440,5334.21 4415,5359.21 4360,5359.21
  region net 120V: 6999.99,4870 7250,4870 7250,5075 7085,5240 6999.99,5240
  region net NetF1_P1_3: 7280,2560 7280,2880 7500,3100 7800,3100 7800,2520 7320,2520
  region net NetF1_P2_3: 7280,3960 7280,4280 7500,4500 7800,4500 7800,3920 7320,3920
  region net NetF1_P3_3: 7280,5360 7280,5680 7500,5900 7800,5900 7800,5320 7320,5320
  region net 120V: 5700,1125 5775,1050 7175,1050 7250,1125 7250,2070 6725,2070 6725,1575 5700,1575
  region net 120V: 7250,2070 7250,4870 7000,4870 7000,2070
  region net 120V: 6380,2360 6460,2440 7000,2440 7000,2070 6380,2070
  region net NetQH_P1_3: 6640,2770 6935,2770 6970,2735 6970,2550 6940,2520 6640,2520
  region net GND: 6220,2280 6130,2280 6100,2250 6100,2100 6130,2070 6220,2070
  region net GND: 6510,2845 6510,3005 6670,3005 6735,2940 6735,2845
  region net NetQH_P1_3: 6510,2520 6510,2605 6490,2625 6460,2625 6460,2770 6640,2770 6640,2520
  region net NetQH_P2_3: 6640,4170 6935,4170 6970,4135 6970,3950 6940,3920 6640,3920
  region net GND: 6510,4245 6510,4405 6670,4405 6735,4340 6735,4245
  region net NetQH_P2_3: 6510,3920 6510,4005 6490,4025 6460,4025 6460,4170 6640,4170 6640,3920
  region net 120V: 6380,3760 6460,3840 7000,3840 7000,3470 6380,3470
  region net GND: 6220,3680 6130,3680 6100,3650 6100,3500 6130,3470 6220,3470
  region net NetQH_P3_3: 6640,5570 6935,5570 6970,5535 6970,5350 6940,5320 6640,5320
  region net NetQH_P3_3: 6510,5320 6510,5405 6490,5425 6460,5425 6460,5570 6640,5570 6640,5320
  region net 120V: 6380,5160 6460,5240 6999.99,5240 6999.99,4870 6380,4870
  region net GND: 6510,5645 6510,5805 6670,5805 6735,5740 6735,5645
  region net GND: 6220,5080 6130,5080 6100,5050 6100,4900 6130,4870 6220,4870
  region: 6220,5080
  region: 6220,5080
Bottom Layer:
  pour cut-out: 4227.05,4937.32 4362.05,4937.32 4362.05,4732.32 4387.05,4707.32 4442.05,4707.32 4442.05,4677.32 4407.05,4677.32 4397.05,4667.32 4397.05,4577.32 4382.05,4562.32 4312.05,4562.32 4227.05,4647.32
  pour cut-out: 5695,1480 5805,1480 5805,1575 5695,1575
  pour cut-out: 6725,1050 7175,1050 7175,1900 6725,1900
  pour cut-out: 6345,1480 6455,1480 6455,1575 6345,1575
  pour cut-out: 7260,5305 7380,5305 7400,5325 7825,5325 7825,5925 7500,5925 7275,5700 7275,5560 7260,5545
  pour cut-out: 7260,3905 7380,3905 7400,3925 7825,3925 7825,4525 7500,4525 7275,4300 7275,4160 7260,4145
  pour cut-out: 6873,5306 6993,5306 6993,5546 6873,5546
  pour cut-out: 6873,3906 6993,3906 6993,4146 6873,4146
  pour cut-out: 6873,2506 6993,2506 6993,2746 6873,2746
  pour cut-out: 7260,2505 7380,2505 7400,2525 7825,2525 7825,3125 7500,3125 7275,2900 7275,2760 7260,2745
  pour cut-out: 4570,5124.21 4435,5124.21 4435,5329.21 4410,5354.21 4355,5354.21 4355,5384.21 4390,5384.21 4400,5394.21 4400,5484.21 4415,5499.21 4485,5499.21 4570,5414.21

## Silkscreen, mask and mechanical layers (free items; w line width, h text height)
Top Overlay:
  lines w7.87: 3925,2575 4025,2575 ; 3925,2675 4025,2675 ; 3925,3375 3925,3475 ; 3925,4200 3925,4300 ; 3925,5000 3925,5100 ; 4325,1950 4425,1950 ; 4675,1950 4775,1950 ; 5025,1950 5125,1950 ; 6270,2640 6270,2840 ; 6270,4040 6270,4240 ; 6270,5440 6270,5640
  lines w10: 7275,2775 7275,2875 7500,3100 7800,3100 7800,2525 7450,2525 ; 7275,4175 7275,4275 7500,4500 7800,4500 7800,3925 7450,3925 ; 7275,5575 7275,5675 7500,5900 7800,5900 7800,5325 7625,5325 7450,5325 ; 6725,1050 6950,1050 7175,1050 7175,1900 6725,1900 6725,1050 ; 7350,1050 7800,1050 7800,1900 7350,1900 7350,1050
  text "STANDOFF" at 3875,5975 h30
  text "STANDOFF" at 6975,5975 h30
  text "PHASE W" at 7550,5925 h30
  text "LW" at 6420,5570 h30 r90
  text "HW" at 6420,5460 h30 r90
  text "A" at 4830,4785 h700
  text "PHASE V" at 7550,4525 h30
  text "USART_RX" at 5275,4435 h30
  text "USART_TX" at 5275,4335 h30
  text "ON_SW" at 5275,4235 h30
  text "LV" at 6420,4170 h30 r90
  text "TRIG" at 4545,4151 h30 r315
  text "EX_TRIG" at 5275,4135 h30
  text "HV" at 6420,4060 h30 r90
  text "M_HB" at 5275,4035 h30
  text "HB" at 4440,3965 h30 r315
  text "V_HIGH" at 5275,3935 h30
  text "W_HIGH" at 5275,3835 h30
  text "U_HIGH" at 5275,3735 h30
  text "W_HALL" at 5275,3635 h30
  text "V_HALL" at 5275,3535 h30
  text "U_HALL" at 5275,3435 h30
  text "V_LOW" at 5275,3335 h30
  text "W_LOW" at 5275,3235 h30
  text "U_VOLT" at 5275,3135 h30
  text "PHASE U" at 7550,3125 h30
  text "THROT" at 5275,3035 h30
  text "W_VOLT" at 5275,2935 h30
  text "V_VOLT" at 5275,2835 h30
  text "VDD" at 4050,2810 h30
  text "LU" at 6420,2780 h30 r90
  text "U_VOLT" at 5275,2735 h30
  text "TCK" at 4050,2710 h30
  text "HU" at 6420,2670 h30 r90
  text "GND" at 4050,2610 h30
  text "TMS" at 4050,2510 h30
  text "NRST" at 4050,2410 h30
  text "PB3" at 4050,2310 h30
  text "+VBatt" at 6850,1925 h30
  text "GND" at 7525,1925 h30
  text "STANDOFF" at 3875,1275 h30
Bottom Overlay:
  drawing of 18 lines, arcs and shapes, not listed
  text "24V" at 4620,6010 h30 r270
  text "GND" at 4730,6010 h30 r270
  text "GND" at 4840,6010 h30 r270
  text "USART_TX" at 4945,6010 h30 r270
  text "24V" at 4565,5705 h30 r270
  text "24V" at 4675,5705 h30 r270
  text "GND" at 4785,5705 h30 r270
  text "ON_SW" at 4895,5645 h30 r270
  text "USART_RX" at 5005,5555 h30 r270
  text "'.Pcb_File_Name_No_Path' / Revision 4" at 4750,2575 h60 r270
  text "5V" at 4565,1485 h30 r270
  text "GND" at 4675,1485 h30 r270
  text "HALLA" at 4780,1485 h30 r270
  text "HALLC" at 4890,1485 h30 r270
  text "THROT" at 5000,1485 h30 r270
  text "5V" at 4620,1205 h30 r270
  text "GND" at 4730,1175 h30 r270
  text "HALLB" at 4845,1115 h30 r270
  text "HB/TRIG" at 4950,1060 h30 r270
Mechanical 1:
  the board outline again, w10

## Text inside footprints (layer, text, board x,y; h text height)
C1: Top Overlay "+" at 4090,5320 h30 r270
C4: Top Overlay "+" at 4710,5529.21 h30 r90
C5: Top Overlay "+" at 5780,1405 h30 r90
C6: Top Overlay "+" at 6430,1410 h30 r90
C22: Top Overlay "+" at 4089.61,4530 h30 r270